# Altium PCB GSX.PcbDoc
Units mil, origin at the board's own origin, x right, y up, seen from the top; angles counter-clockwise.
Board outline 2650 x 2065 mil, 2 copper layers (Top Layer, Bottom Layer); 10 components, 14 nets, 109 pads, 7 vias.
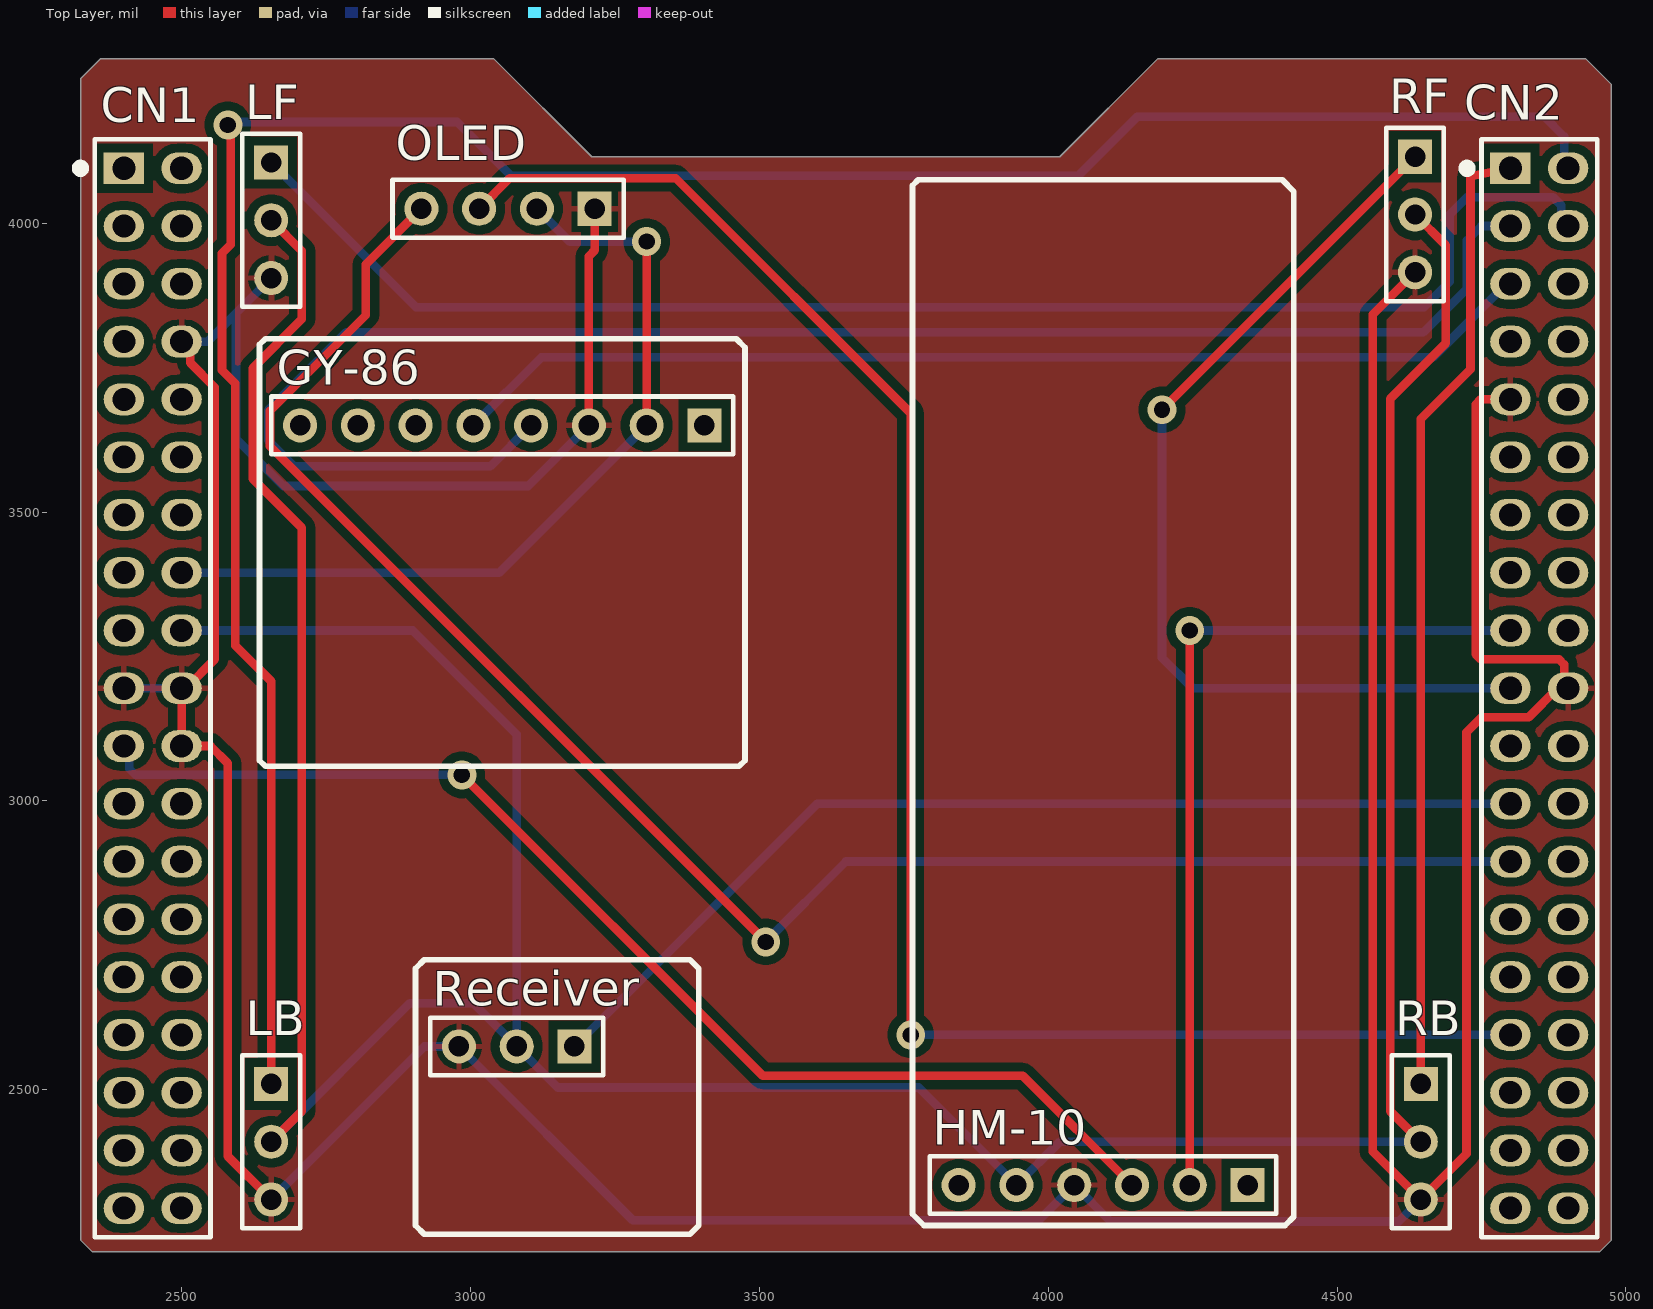
[diagram p0: Top Layer view]
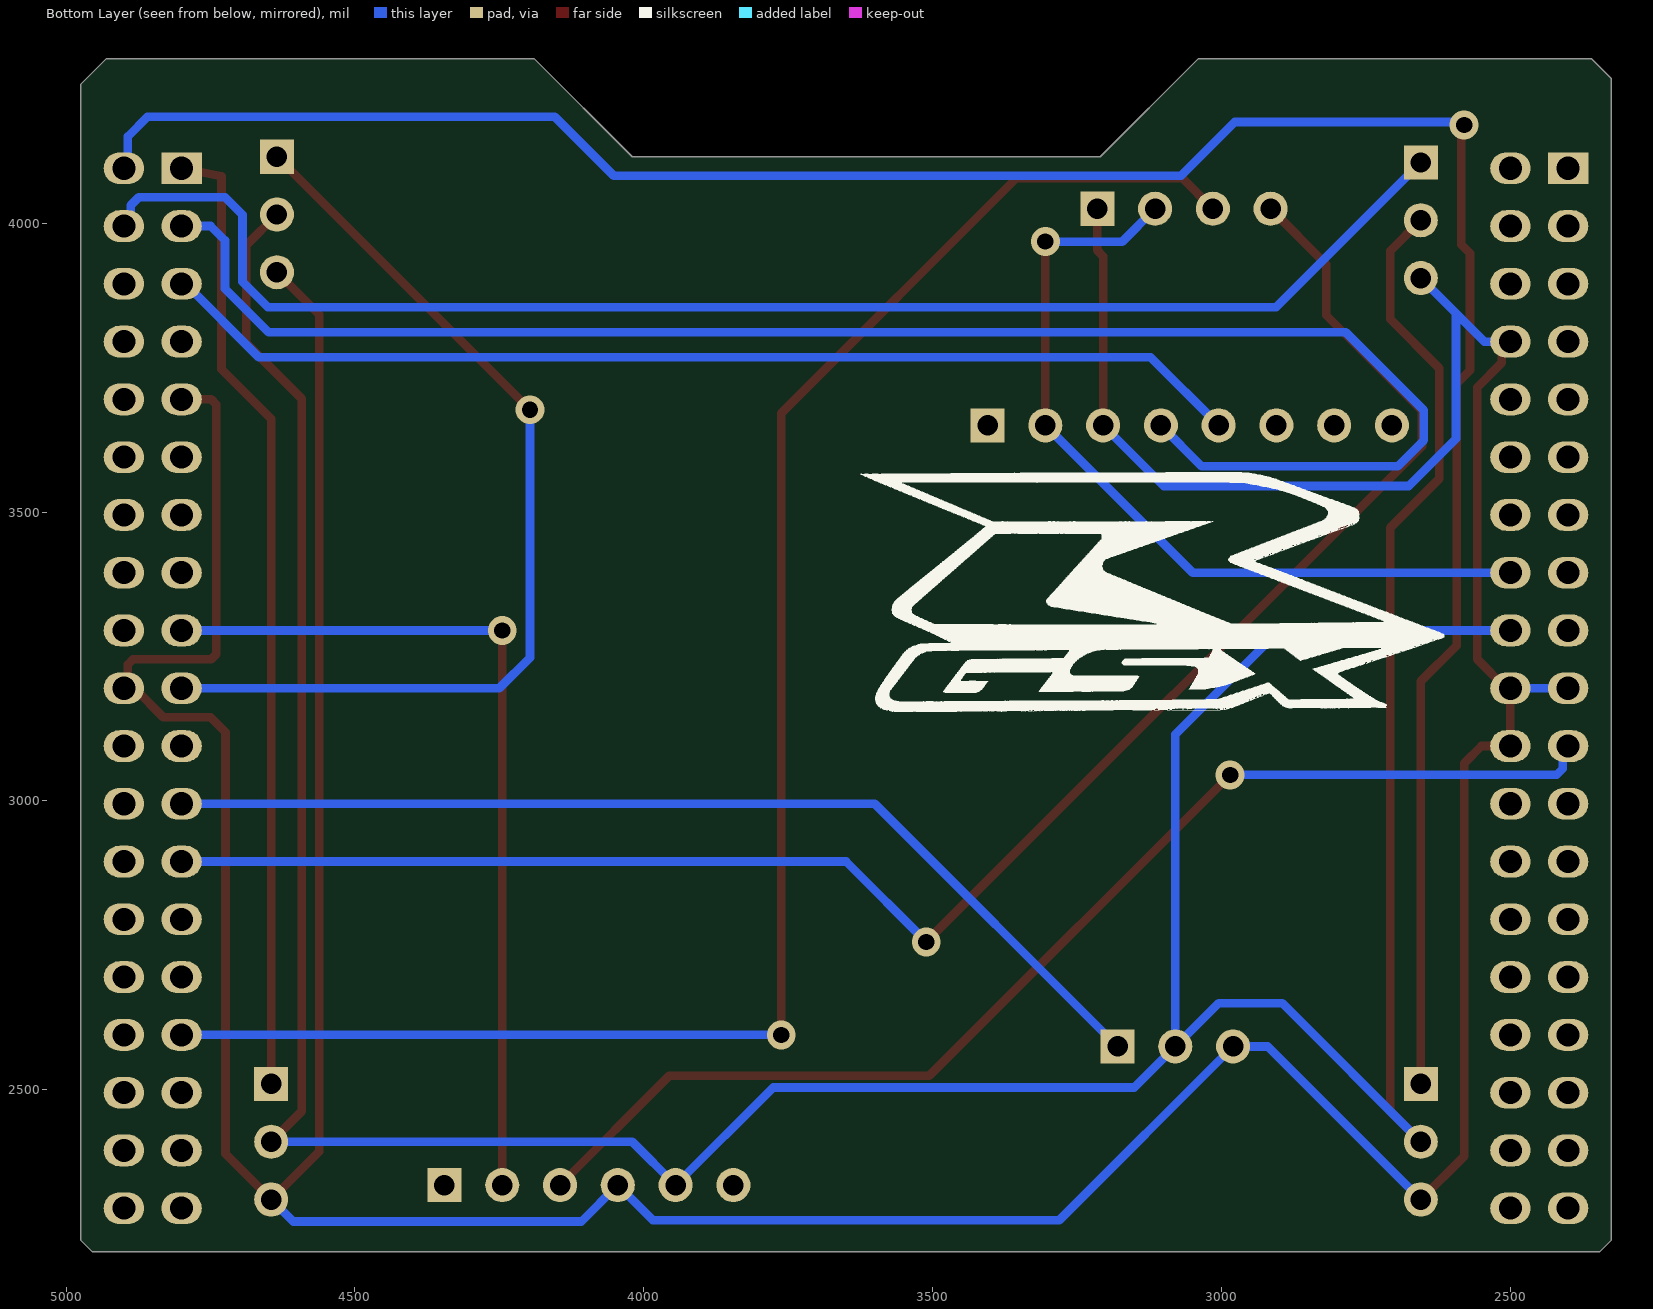
[diagram p1: Bottom Layer view, seen from below]

## Layer stack, top to bottom
Top Solder: solder mask 0.4, Solder Resist, Dk 3.5
Top Layer: signal copper 1.4
Dielectric 1: dielectric 12.6, FR-4, Dk 4.8
Bottom Layer: signal copper 1.4
Bottom Solder: solder mask 0.4, Solder Resist, Dk 3.5

## Board outline
2325,2240 2325,4250 2360,4285 3040,4285 3210,4115 4020,4115 4190,4285 4930,4285 4975,4240 4975,2240 4955,2220 2345,2220

## Design rules (kind name [scope] priority, off if disabled: settings)
Clearance [All] p1: gap=15 ignorepadtopadclearanceinfootprint=TRUE
PolygonConnect [All] p1: connectstyle=Relief reliefconductorwidth=10 reliefentries=4 polygonreliefangle="90 Angle" airgapwidth=10
RoutingVias [All] p1: holewidth=28 width=50 viastyle="Through Hole" minholewidth=28 minwidth=50 maxholewidth=28 maxwidth=50
SolderMaskExpansion [All] p1: expansion=4 istentingtop=FALSE
UnRoutedNet [All] p1: checkbadconnections=TRUE
Width [All] p1: maxlimit=15 minlimit=15 preferedwidth=15 minimp=50.000000 maximp=50.000000 favimp=50.000000
29 further rules are at their usual default settings.

## Components (designator, comment, footprint, x,y, rotation, side; value= is the part's Value field where it differs from the comment)
CN1 "Input Left" 2*19P 2400,4095 r270 top locked
CN2 "Input Right" 2*19P 4800,4095 r270 top locked
GY-86 "GY-86 Output" HDR1X8 3405,3650 r180 top
HM-10 "BlueTeeth Output" HDR1X6 4345,2335 r180 top
LB "Motor LB" HDR1X3 2655,2510 r270 top
LF "Motor LF" HDR1X3 2655,4105 r270 top
OLED "OLED Output" HDR1X4 3215,4025 r180 top
RB "Motor RB" HDR1X3 4645,2510 r270 top
Receiver "Receiver Input" HDR1X3 3180,2575 r180 top
RF "Motor RF" HDR1X3 4635,4115 r270 top

## Footprints (in the part's own frame and the unit in brackets; to place one, negate y for a bottom-side part, rotate by r counter-clockwise, add the part's x,y. Pads: shape width x height; smd on the part's side, far side on the other; paste and mask are expansions set on the pad)
2*19P [mil]
  rect 55x70 hole 40: 1(0,0)
  oval 55x70 hole 40: 2(0,100) 3(100,0) 4(100,100) 5(200,0) 6(200,100) 7(300,0) 8(300,100) 9(400,0) 10(400,100) 11(500,0) 12(500,100) 13(600,0) 14(600,100) 15(700,0) 16(700,100) 17(800,0) 18(800,100) 19(900,0) 20(900,100) 21(1000,0) 22(1000,100) 23(1100,0) 24(1100,100) 25(1200,0) 26(1200,100) 27(1300,0) 28(1300,100) 29(1400,0) 30(1400,100) 31(1500,0) 32(1500,100) 33(1600,0) 34(1600,100) 35(1700,0) 36(1700,100) 37(1800,0) 38(1800,100)
  silkscreen extent -50,-82 1850,150
HDR1X3 [mm] "Connector; Header; 3 Position"
  rect 1.5x1.5 hole 0.9: 1(0,0)
  round 1.5 hole 0.9: 2(2.54,0) 3(5.08,0)
  silkscreen extent -1.27,-1.27 6.35,1.27
HDR1X4 [mm] "Connector; Header; 4 Position"
  rect 1.5x1.5 hole 0.9: 1(0,0)
  round 1.5 hole 0.9: 2(2.54,0) 3(5.08,0) 4(7.62,0)
  silkscreen extent -1.27,-1.27 8.89,1.27
HDR1X6 [mm] "Connector; Header; 6 Position"
  rect 1.5x1.5 hole 0.9: 1(0,0)
  round 1.5 hole 0.9: 2(2.54,0) 3(5.08,0) 4(7.62,0) 5(10.16,0) 6(12.7,0)
  silkscreen extent -1.27,-1.27 13.97,1.27
HDR1X8 [mm] "Connector; Header; 8 Position"
  rect 1.5x1.5 hole 0.9: 1(0,0)
  round 1.5 hole 0.9: 2(2.54,0) 3(5.08,0) 4(7.62,0) 5(10.16,0) 6(12.7,0) 7(15.24,0) 8(17.78,0)
  silkscreen extent -1.27,-1.27 19.05,1.27

## Part data
CN1 CN2: library part "Header 19X2", "Header, 19-Pin, Dual row", LatestRevisionDate=17-Jul-2002, LatestRevisionNote="Re-released for DXP Platform.", Publisher="Altium Limited"
GY-86: library part "Header 8", "Header, 8-Pin", LatestRevisionDate=17-Jul-2002, LatestRevisionNote="Re-released for DXP Platform.", Publisher="Altium Limited"
HM-10: library part "Header 6", "Header, 6-Pin", LatestRevisionDate=17-Jul-2002, LatestRevisionNote="Re-released for DXP Platform.", Publisher="Altium Limited"
LB LF RB Receiver RF: library part "Header 3", "Header, 3-Pin", LatestRevisionDate=17-Jul-2002, LatestRevisionNote="Re-released for DXP Platform.", Publisher="Altium Limited"
OLED: library part "Header 4", "Header, 4-Pin", LatestRevisionDate=17-Jul-2002, LatestRevisionNote="Re-released for DXP Platform.", Publisher="Altium Limited"

## Via types
v1: diameter 50, hole 28, Top Layer to Bottom Layer, 7 vias

## Nets (pads, with @x,y where several pads share a name; then routed paths per layer and width w, separated by ;. In a path a pad name is that pad's centre, name@x,y a point inside that pad or via, vN(x,y) a via of type N, cw(c..) or ccw(c..) an arc to the next point about the centre after c; other vN are vias at no path point)
3V3: CN1.16 GY-86.2 OLED.2 | length 1442.2
  Top Layer w15: GY-86.2 v1(3305,3968)
  Bottom Layer w15: CN1.16 3050,3395 GY-86.2 ; OLED.2 3172,3968 v1(3305,3968)
5V: CN1.18 HM-10.5 LB.2 LF.2 RB.2 Receiver.2 RF.2 | length 6843.5
  Top Layer w15: LB.2 2708,2463 2708,3472.74 2622.97,3557.76 2622.97,3748.97 2708,3834 2708,3952 LF.2 ; RF.2 4688,3962 4688,3792 4592,3696 4592,2463 RB.2
  Bottom Layer w15: CN1.18 2900,3295 3080,3115 Receiver.2 ; LB.2 2895,2650 3005,2650 Receiver.2 ; RB.2 4020,2410 HM-10.5 3776,2504 3151,2504 Receiver.2
GND: CN1.8 CN1.19 CN1.20 CN1.22 CN2.9 CN2.20 GY-86.3 HM-10.4 LB.3 LF.3 OLED.1 RB.3 Receiver.3 RF.3 | length 8923.6
  Top Layer w15: CN1.8 2515,3780 2515,3758.21 2557.5,3715.71 2557.5,3245 2507.5,3195 CN1.20 CN1.22 2550,3095 2580,3065 2580,2385 LB.3 ; GY-86.3 3205,3942.97 3215,3952.97 OLED.1 ; RF.3 4562,3842 4562,2393 RB.3 4724,2389 4724,3119 4750,3145 4831.68,3145 4881.68,3195 CN2.20 ; CN2.9 4748.79,3695 4740,3686.21 4740,3253.79 4748.79,3245 4884.21,3245 4893,3236.21 CN2.20@4893,3195
  Bottom Layer w15: CN1.19 CN1.20 ; CN1.8 2545,3795 2594,3844 ; LB.3 2920,2575 Receiver.3 3281,2274 3984,2274 HM-10.4 4108,2272 4607,2272 RB.3 ; LF.3 2594,3844 ; GY-86.3 3100,3545 2676,3545 2594,3627 2594,3844
I2C_SCL: CN2.3 GY-86.4 | length 2886.1
  Bottom Layer w15: GY-86.4 3034,3579 2695,3579 2650,3624 2650,3676 2785,3811 4649.43,3811 4725,3886.57 4725,3970 4750,3995 CN2.3
I2C_SDA: CN2.5 GY-86.5 | length 1896.5
  Bottom Layer w15: GY-86.5 3123,3768 4666.43,3768 4793.43,3895 CN2.5
PB3: CN2.31 OLED.3 | length 3051.5
  Top Layer w15: OLED.3 3068,4078 3355,4078 3762,3671 v1(3762,2595)
  Bottom Layer w15: v1(3762,2595) CN2.31
PB10: CN2.25 OLED.4 | length 3079.5
  Top Layer w15: OLED.4 2819,3929 2819,3841.03 2652.97,3675 2652.97,3614.03 v1(3511,2756)
  Bottom Layer w15: v1(3511,2756) 3650,2895 CN2.25
RXD: CN2.17 HM-10.2 | length 1515
  Top Layer w15: HM-10.2 v1(4245,3295)
  Bottom Layer w15: v1(4245,3295) CN2.17
TIM1_CH1: CN2.23 Receiver.1 | length 1794
  Bottom Layer w15: Receiver.1 3600,2995 CN2.23
TIM3_CH1: CN2.4 LF.1 | length 2530.3
  Bottom Layer w15: LF.1 2905.29,3854.71 4650.71,3854.71 4694.53,3898.53 4694.53,4014.53 4725,4045 4874.22,4045 4888,4031.21 4888,4007 CN2.4
TIM3_CH2: CN2.19 RF.1 | length 1673.4
  Top Layer w15: v1(4197,3677) RF.1
  Bottom Layer w15: v1(4197,3677) 4197,3248 4250,3195 CN2.19
TIM3_CH3: CN2.2 LB.1 | length 4171.3
  Top Layer w15: v1(2580,4170) 2585,4165 2585,3963.08 2570,3948.08 2570,3745.64 2592.97,3722.66 2592.97,3269.03 2655,3207 LB.1
  Bottom Layer w15: v1(2580,4170) 2585,4175 2977,4175 3070,4082 4052,4082 4154,4184 4859,4184 4893,4150 4893,4102 CN2.2
TIM3_CH4: CN2.1 RB.1 | length 1677
  Top Layer w15: RB.1 4645,3661 4731,3747 4731,4081 CN2.1
TXD: CN1.21 HM-10.3 | length 2077.4
  Top Layer w15: v1(2985,3045) 3506,2524 3956,2524 HM-10.3
  Bottom Layer w15: CN1.21 2409.11,3085.89 2409.11,3055.89 2420,3045 v1(2985,3045)
pads on no net: CN1.1 CN1.2 CN1.3 CN1.4 CN1.5 CN1.6 CN1.7 CN1.9 CN1.10 CN1.11 CN1.12 CN1.13 CN1.14 CN1.15 CN1.17 CN1.23 CN1.24 CN1.25 CN1.26 CN1.27 CN1.28 CN1.29 CN1.30 CN1.31 CN1.32 CN1.33 CN1.34 CN1.35 CN1.36 CN1.37 CN1.38 CN2.6 CN2.7 CN2.8 CN2.10 CN2.11 CN2.12 CN2.13 CN2.14 CN2.15 CN2.16 CN2.18 CN2.21 CN2.22 CN2.24 CN2.26 CN2.27 CN2.28 CN2.29 CN2.30 CN2.32 CN2.33 CN2.34 CN2.35 CN2.36 CN2.37 CN2.38 GY-86.1 GY-86.6 GY-86.7 GY-86.8 HM-10.1 HM-10.6

## Polygon pours and split planes (outlines as drawn)
GND on Top Layer "GND_L01_P005" (solid, remove dead copper, pour order 5): 3210,4115 4020,4115 4190,4285 4930,4285 4975,4240 4975,2240 4955,2220 2345,2220 2325,2240 2325,4250 2360,4285 3040,4285
GND on Top Layer "GND_L01_P004" (solid, remove dead copper, pour order 4): 3210,4115 4020,4115 4190,4285 4930,4285 4975,4240 4975,2240 4955,2220 2345,2220 2325,2240 2325,4250 2360,4285 3040,4285

## Silkscreen, mask and mechanical layers (free items; w line width, h text height)
Top Overlay:
  lines w10: 2635,3070 2635,3790 2645,3800 2695,3800 3460,3800 3475,3785 3475,3070 3465,3060 2645,3060 2635,3070 ; 2905,2265 2905,2710 2920,2725 2975,2725 3380,2725 3395,2710 3395,2265 3380,2250 2920,2250 2905,2265 ; 3765,2285 3765,4065 3775,4075 4405,4075 4425,4055 4425,2280 4410,2265 4340,2265 3785,2265 3765,2285
Bottom Overlay:
  region: 2851 vertices and 64 holes, not listed, extent 2614.56,3154.51 3624.35,3568.96
Mechanical 1:
  lines w10: 2325,2240 2325,4250 2360,4285 3040,4285 3210,4115 4020,4115 4190,4285 4930,4285 4975,4240 4975,2240 4955,2220 4870,2220 2345,2220 2325,2240